# EAGLE board Piano Circuit Design Board (EAGLE 9.6.2)
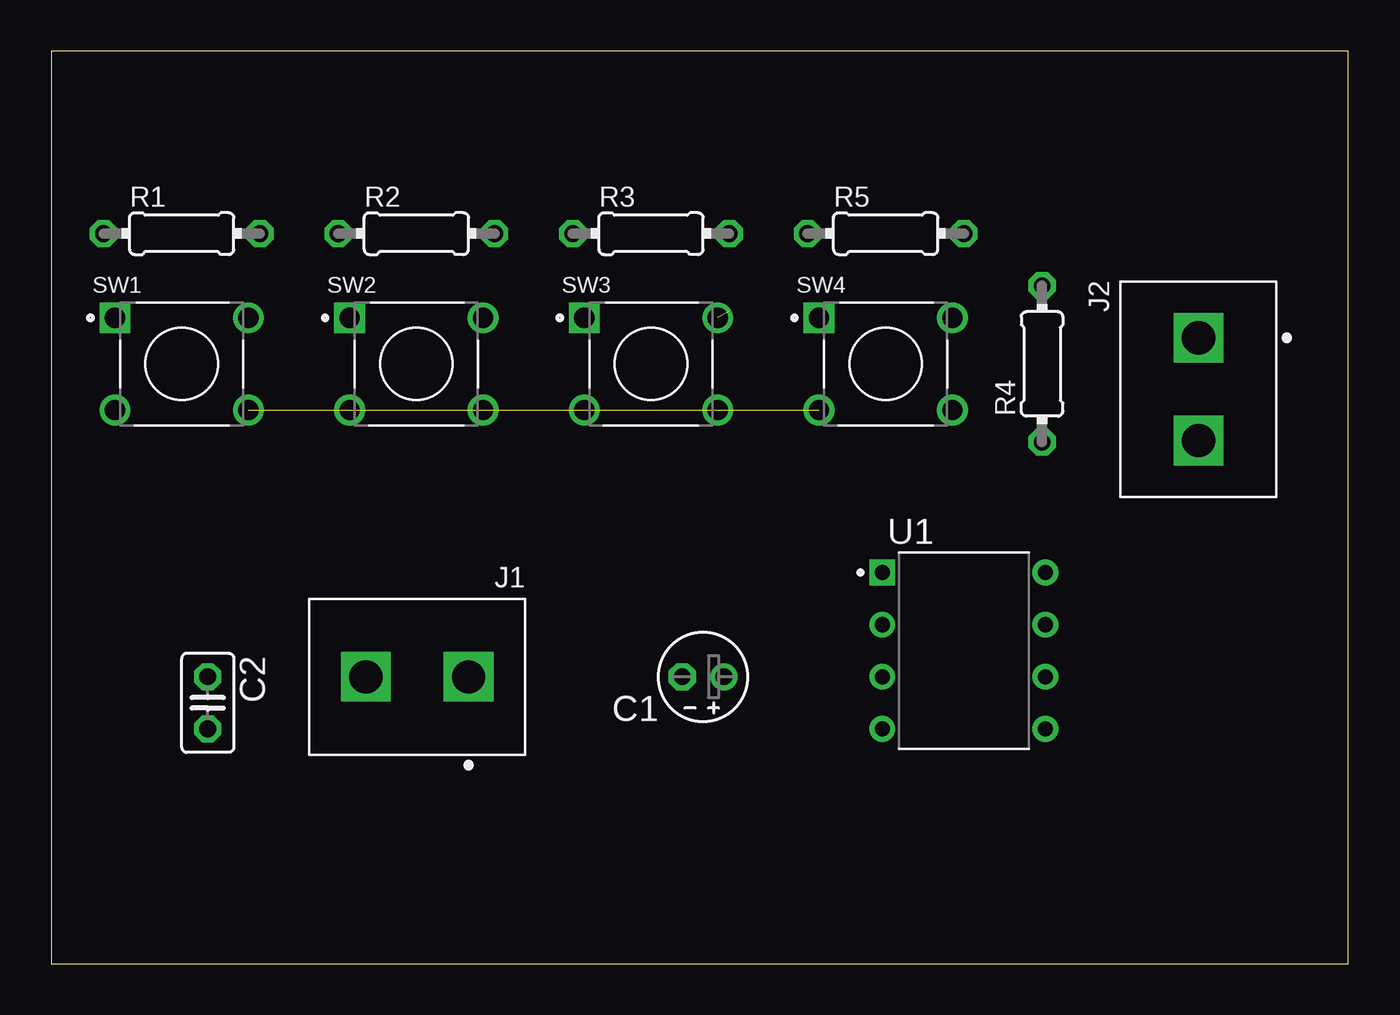
[diagram p0: board, top side]
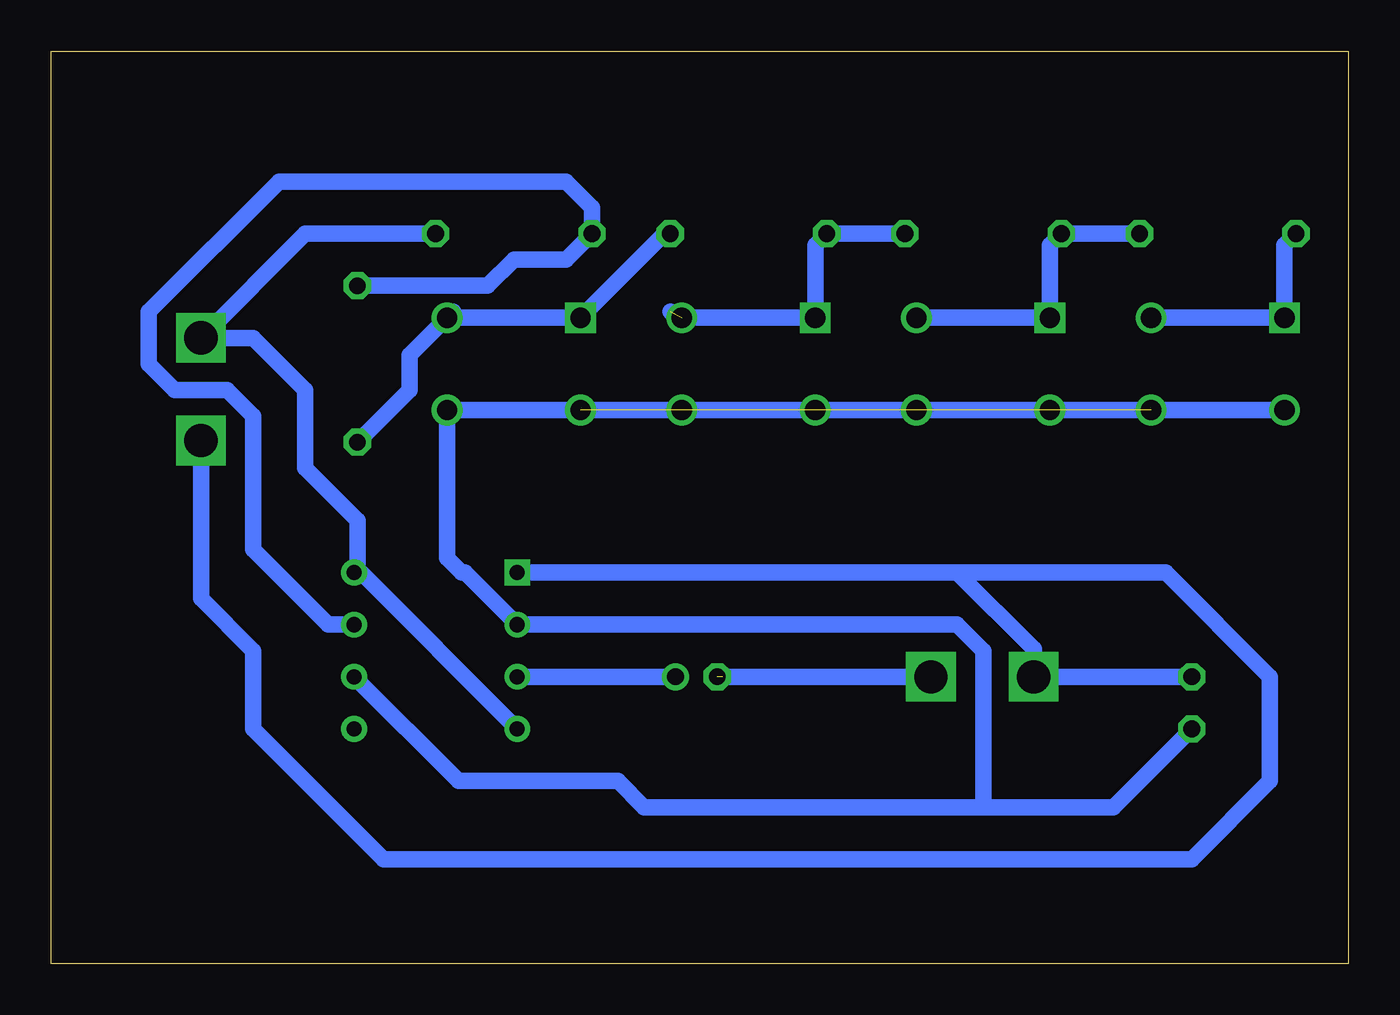
[diagram p1: board, bottom side, seen from below]

Size 63.17 x 44.44 mm. Coordinates in mm from the lower left corner, seen from the top.
Outline: 0,0 63.17,0 63.17,44.44 0,44.44 0,0
Copper layers (1*16): Top 0.035mm / dielectric 1.5mm / Bottom 0.035mm
Design rules "default": minimum track width 6mil, minimum drill 0.35mm, track to track 6mil, track to pad 6mil, pad to pad 6mil, via to via 6mil, smd to smd 6mil, copper to edge 40mil, drill to drill 6mil, minimum pad ring 10mil, minimum via ring 8mil, stop-mask expansion 4mil, vias tented up to drill 0mil, thermal gap 10mil

## Footprints (pad centres in the part's own frame; a part is rotated, then mirrored left to right if it is on the bottom)
E2-4 = drill 0.813 pad 1.27: + -1.016,0 | drill 0.813 pad 1.27 octagon: - 1.016,0
C025-025X050 = drill 0.813 octagon: 1 -1.27,0; 2 1.27,0
EBBA-02-C-SS-BU = drill 1.614 pad 2.421 square: 1 0,0; 2 5,0
0204/7 = drill 0.813 octagon: 1 -3.81,0; 2 3.81,0
SW_1825910-6-4 = drill 0.99 square: 1 -3.25,2.25 | drill 0.99: 2 3.25,2.25; 3 -3.25,-2.25; 4 3.25,-2.25
DIP794W45P254L959H508Q8 = drill 0.74 pad 1.13 square: 1 -3.97,3.81 | drill 0.74 pad 1.13: 2 -3.97,1.27; 3 -3.97,-1.27; 4 -3.97,-3.81; 5 3.97,-3.81; 6 3.97,-1.27; 7 3.97,1.27; 8 3.97,3.81

## Placement (x,y rotation side)
C1  [E2-4]  31.75,13.97 180 top
C2  [C025-025X050]  7.62,12.7 270 top
J1  EBBA-02-C-SS-BU  [EBBA-02-C-SS-BU]  20.32,13.97 180 top
J2  EBBA-02-C-SS-BU  [EBBA-02-C-SS-BU]  55.88,30.48 270 top
R1  [0204/7]  6.35,35.56 0 top
R2  [0204/7]  17.78,35.56 0 top
R3  [0204/7]  29.21,35.56 0 top
R4  [0204/7]  48.26,29.21 90 top
R5  [0204/7]  40.64,35.56 0 top
SW1  1825910-6  [SW_1825910-6-4]  6.35,29.21 0 top
SW2  1825910-6  [SW_1825910-6-4]  17.78,29.21 0 top
SW3  1825910-6  [SW_1825910-6-4]  29.21,29.21 0 top
SW4  1825910-6  [SW_1825910-6-4]  40.64,29.21 0 top
U1  LM555CN/NOPB  [DIP794W45P254L959H508Q8]  44.45,15.24 0 top

## Library data of the parts
C1 C2 = rcl; SPICEPREFIX: C
J1 J2 = EBBA-02-C-SS-BU; AVAILABILITY: In Stock; CHECK_PRICES: https://www.snapeda.com/parts/EBBA-02-C-SS-BU/Adam+Tech/view-part/?ref=eda; DESCRIPTION: Terminal block, EURO BLOCK, slotted screw, 5.00mm pitch, blue, 2 position | Adam Tech EBBA-02-C-SS-BU; MF: Adam Tech; MP: EBBA-02-C-SS-BU; PACKAGE: None; PRICE: None; SNAPEDA_LINK: https://www.snapeda.com/parts/EBBA-02-C-SS-BU/Adam+Tech/view-part/?ref=snap
R1-R5 = rcl; SPICEPREFIX: R
SW1-SW4 = 1825910-6; AVAILABILITY: In Stock; CHECK_PRICES: https://www.snapeda.com/parts/1825910-6/TE+Connectivity+Alcoswitch+Switches/view-part/?ref=eda; COMMENT: 1825910-6; DESCRIPTION: Switch Push Button OFF (ON) SPST Round Button 0.05A 24VDC Momentary Contact PC Pins Thru-Hole; MF: TE Connectivity; MP: 1825910-6; PACKAGE: None; PRICE: None; SNAPEDA_LINK: https://www.snapeda.com/parts/1825910-6/TE+Connectivity+Alcoswitch+Switches/view-part/?ref=snap
U1 = LM555CN_NOPB; AVAILABILITY: In Stock; CHECK_PRICES: https://www.snapeda.com/parts/LM555CN/NOPB/Texas+Instruments/view-part/?ref=eda; DESCRIPTION: Highly Stable 555 Timer; MF: Texas Instruments; MP: LM555CN/NOPB; PACKAGE: PDIP-8 Texas; PRICE: None; SNAPEDA_LINK: https://www.snapeda.com/parts/LM555CN/NOPB/Texas+Instruments/view-part/?ref=snap

## Nets
N$1: R1.2 R2.1 SW2.1 SW2.2
N$2: R2.2 R3.1 SW3.1 SW3.2
N$3: R3.2 R4.1 SW4.1 SW4.2
N$4: R1.1 SW1.1 SW1.2
N$6: C2.1 J1.2 J2.2 U1.1
N$7: C1.+ U1.3
N$8: C1.- J1.1
N$9: J2.1 R5.2 U1.4 U1.8
N$11: C2.2 SW1.3 SW1.4 SW2.3 SW2.4 SW3.3 SW3.4 SW4.3 SW4.4 U1.2 U1.6
N$12: R4.2 R5.1 U1.7

## Tracks (layer width: path | path; a pad name or v marks a point on that pad's centre or on a via)
N$1
  Bottom 0.813: R1.2 R2.1 14.53,35 SW2.1 SW2.2
N$2  (1 unrouted)
  Bottom 0.813: R2.2 R3.1 25.96,35 SW3.1 32.73,31.46 33.02,31.75
N$3
  Bottom 0.813: SW4.2 43.6,31.75 | SW4.2 45.72,29.63 45.72,27.94 R4.1 | R3.2 33.29,35.56 SW4.1 SW4.2
N$4
  Bottom 0.813: R1.1 3.1,35 SW1.1 SW1.2
N$6
  Bottom 0.813: 19.05,19.05 15.32,15.32 J1.2 C2.1 | 19.05,19.05 U1.1 | J2.2 55.88,17.78 53.34,15.24 53.34,11.43 46.99,5.08 7.62,5.08 3.81,8.89 3.81,13.97 8.89,19.05 19.05,19.05
N$7
  Bottom 0.813: C1.+ U1.3
N$8  (1 unrouted)
  Bottom 0.813: J1.1 30.48,13.97
N$9
  Bottom 0.813: R5.2 50.8,35.56 J2.1 53.34,30.48 50.8,27.94 50.8,24.13 48.26,21.59 48.26,19.21 | U1.4 48.26,19.21 | U1.8 48.26,19.21
N$11  (5 unrouted)
  Bottom 0.813: U1.6 43.34,8.89 35.56,8.89 34.29,7.62 17.78,7.62 | 17.78,7.62 11.43,7.62 C2.2 | SW1.3 SW1.4 SW4.4 43.89,19.76 43.18,19.05 43.02,19.05 U1.2 19.05,16.51 17.78,15.24 17.78,7.62
N$12
  Bottom 0.813: R4.2 41.91,33.02 40.64,34.29 38.1,34.29 R5.1 36.83,36.83 38.1,38.1 52.07,38.1 58.42,31.75 58.42,29.21 57.15,27.94 54.61,27.94 53.34,26.67 53.34,20.16 49.69,16.51 U1.7